# Altium PCB RGBKeyFob - PCB.PcbDoc
Units mm, origin at the board's own origin, x right, y up, seen from the top; angles counter-clockwise.
Board outline 28.22 x 45.2 mm, 2 copper layers (Top Layer, Bottom Layer), stack 1.571 mm thick; 13 components, 9 nets, 42 pads, 0 vias.
Unrouted connection lines stored in the file: 24.
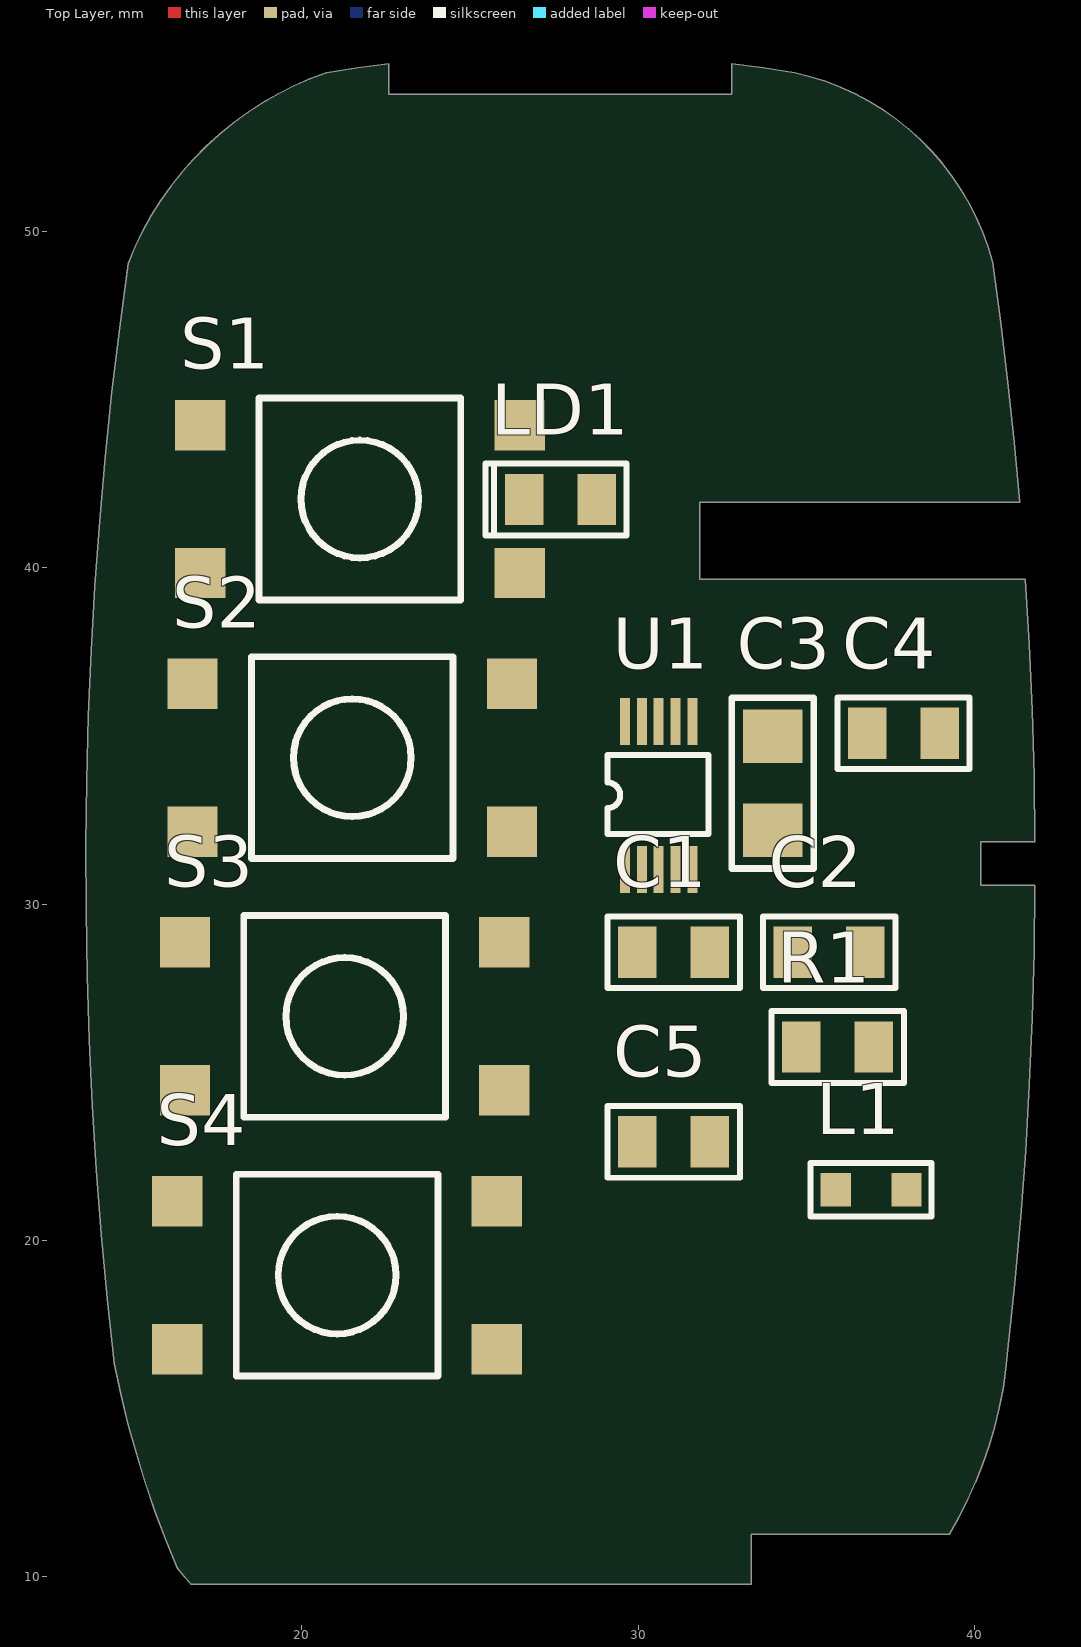
[diagram p0: Top Layer view]
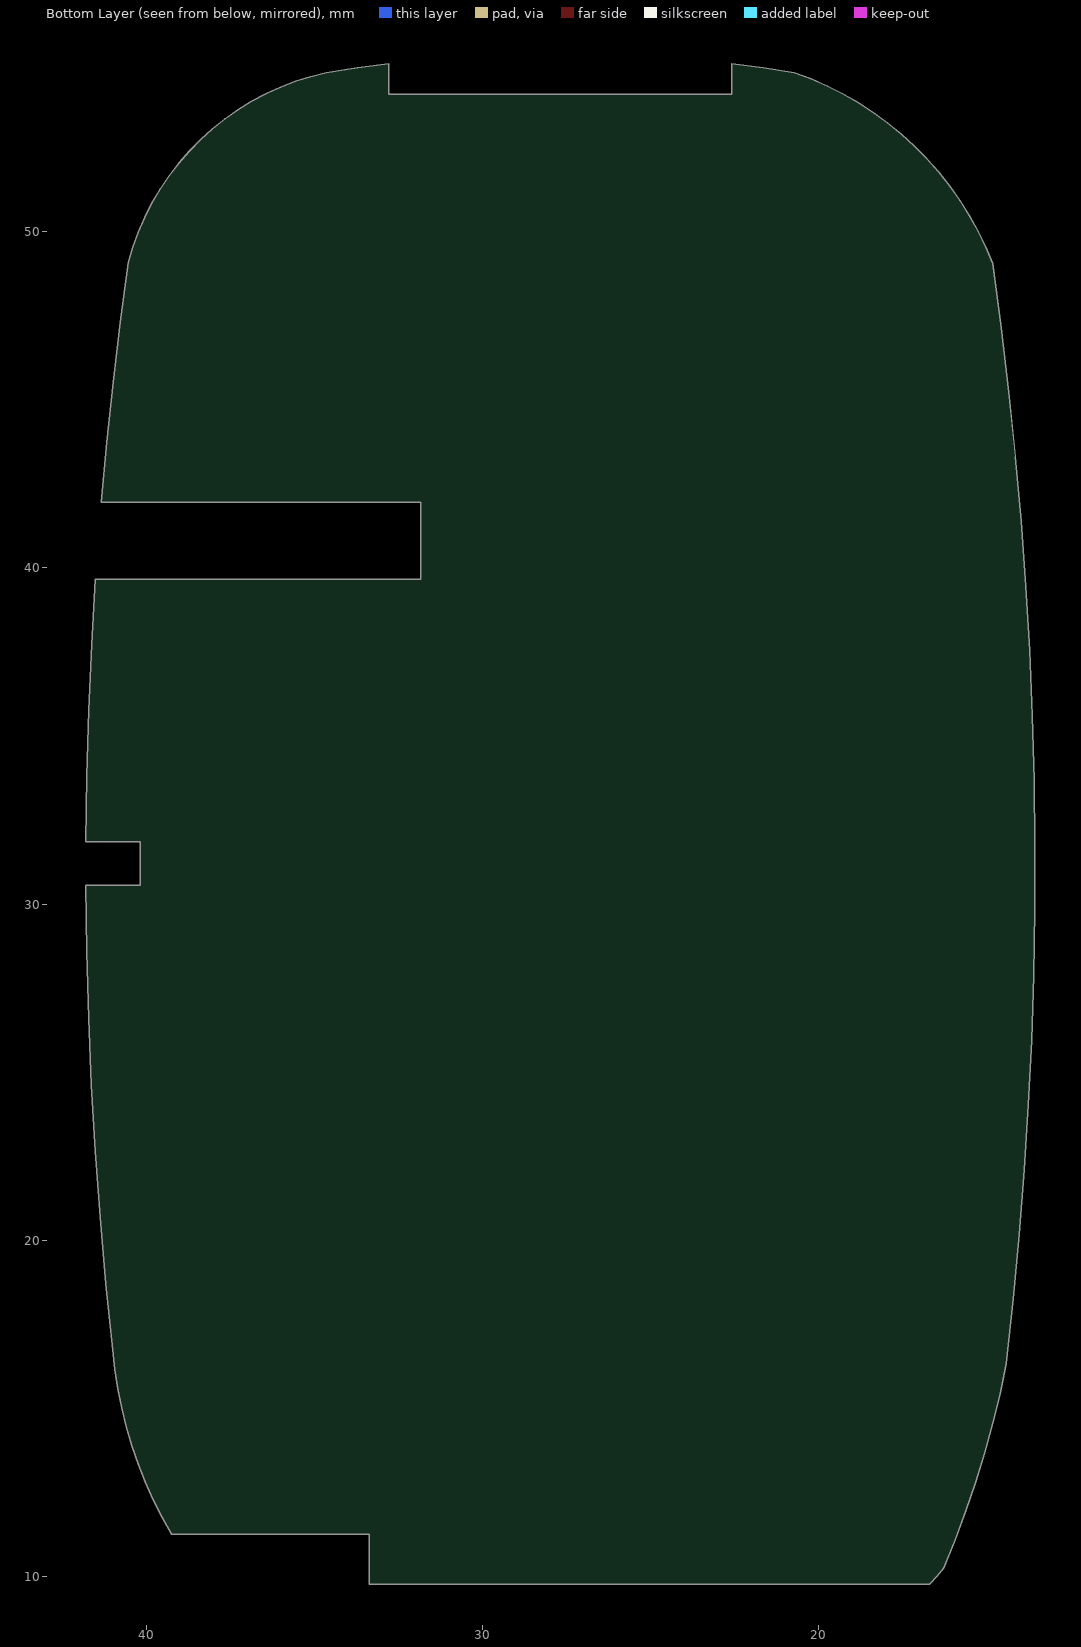
[diagram p1: Bottom Layer view, seen from below]

## Layer stack, top to bottom
Top Solder: solder mask 0.0102, Solder Resist, Dk 3.5
Top Layer: signal copper 0.0356
Dielectric 1: dielectric 1.5, FR-4, Dk 4.8
Bottom Layer: signal copper 0.0356
Bottom Solder: solder mask 0.0102, Solder Resist, Dk 3.5

## Board outline
16.291,10.262 cw(c44.141,22.124) 14.426,16.348 cw(c142.186,31.115) 14.833,49.055 cw(c23.917,45.515) 20.732,54.73 cw(c27.686,11.663) 22.586,54.989 22.586,54.087 32.786,54.087 32.786,54.989 cw(c27.686,11.663) 34.651,54.728 cw(c32.987,47.106) 40.536,49.078 cw(c-86.814,31.115) 41.339,41.954 31.836,41.954 31.836,39.663 41.512,39.663 cw(c-86.814,31.115) 41.795,31.863 40.185,31.863 40.185,30.563 41.796,30.563 cw(c-86.814,31.115) 40.993,16.756 cw(c28.302,17.773) 39.243,11.263 33.367,11.263 33.367,9.786 16.701,9.786 cw(c22.243,14.979)

## Design rules (kind name [scope] priority, off if disabled: settings)
Clearance [All] p1: gap=0.305
MinimumSolderMaskSliver [All] p1: minsoldermaskwidth=0.025
PolygonConnect [All] p1: connectstyle=Relief reliefconductorwidth=0.254 reliefentries=4 polygonreliefangle="90 Angle" airgapwidth=0.254
RoutingVias [All] p1: holewidth=0.711 width=1.27 viastyle="Through Hole" minholewidth=0.711 minwidth=1.27 maxholewidth=0.711 maxwidth=1.27
SilkToSilkClearance [All] p1: silktosilkclearance=0.025
SilkToSolderMaskClearance [IsPad] p1: minsilkscreentomaskgap=0.025 clearancetoexposedcopper=TRUE
SolderMaskExpansion [All] p1: expansion=0.102
UnpouredPolygon [All] p1: allowunpoured=FALSE
Width [All] p1: maxlimit=2.54 minlimit=0.254 preferedwidth=0.254
26 further rules are at their usual default settings.

## Components (designator, comment, footprint, x,y, rotation, side; value= is the part's Value field where it differs from the comment)
C1 "270pF 50V" C0805 31.051,28.575 r0 top
C2 "1nF 50V" C0805 35.674,28.575 r0 top
C3 "2,2uF 25V" C1206 34.001,33.6 r90 top
C4 "3pF 50V" C0805 37.887,35.086 r0 top
C5 "3pF 50V" C0805 31.051,22.936 r0 top
L1 "220nH" I0805 36.927,21.51 r0 top
LD1 "VERDE" LED0805_LED0805B 27.686,42.037 r180 top
R1 "470R 1%" R0805 35.928,25.756 r0 top
S1 "TECLA SMD 4,3mm" TECLA_TS-06M-ASM 21.722,42.051 r0 top
S2 "TECLA SMD 4,3mm" TECLA_TS-06M-ASM 21.497,34.359 r180 top
S3 "TECLA SMD 4,3mm" TECLA_TS-06M-ASM 21.273,26.667 r180 top
S4 "TECLA SMD 4,3mm" TECLA_TS-06M-ASM 21.049,18.975 r180 top
U1 "Si4010" MSOP-10 29.608,30.84 r90 top

## Footprints (in the part's own frame and the unit in brackets; to place one, negate y for a bottom-side part, rotate by r counter-clockwise, add the part's x,y. Pads: shape width x height; smd on the part's side, far side on the other; paste and mask are expansions set on the pad)
C0805 [mil]
  rect 45x60 smd: 1(-42.5,0) 2(42.5,0)
  silkscreen extent -78,-42 78,42, body extent -49,-24 49,25, height 31
C1206 [mil]
  rect 63x70 smd: 1(-55,0) 2(55,0)
  silkscreen extent -100,-48 100,48, body extent -63,-31 63,31, height 39
I0805 [mm]
  rect 0.9x1 smd: 1(-1.05,0) 2(1.05,0)
  silkscreen extent -1.8,-0.8 1.8,0.8, body extent -1,-0.6 1,0.6, height 1
LED0805_LED0805B [mil]
  rect 45x60 smd: 1(-42.5,0) 2(42.5,0)
  silkscreen extent -78,-42 88,42, body extent -40,-25 40,25, height 43
MSOP-10 [mm]
  rect 1.4x0.3 smd: 1(0.2,0) 2(0.2,-0.5) 3(0.2,-1) 4(0.2,-1.5) 5(0.2,-2) 6(4.6,-2) 7(4.6,-1.5) 8(4.6,-1) 9(4.6,-0.5) 10(4.6,0)
  silkscreen extent 1.25,-2.47 3.6,0.53, body extent -0.05,-2.5 4.85,0.5, height 1.15
R0805 [mil]
  rect 45x60 smd: 1(-42.5,0) 2(42.5,0)
  silkscreen extent -78,-42 78,42, body extent -44,-27 46,27, height 34
TECLA_TS-06M-ASM [mm]
  rect 1.5x1.5 smd: 1(-4.75,2.2) 2(4.75,-2.2) 3(4.75,2.2) 4(-4.75,-2.2)
  silkscreen extent -3,-3 3,3, body extent -5,-3.02 5,3.03, height 4.7

## Part data
C1: library part "CC 270pF 50V 0805"
C2: library part "CC 1nF 50V 0805"
C3: library part "CC 2,2uF 25V 1206"
C4 C5: library part "CC 3pF 50V 0805"
L1: library part "IND 220nH 0805 SMD", "IND 220nH 0805 SMD"
LD1: library part "LED VD 0805", "LED SMT 0805"
R1: library part "RES 470R 1% 0805", "RES 470R 1% 0805"
S1 S2 S3 S4: library part "TEC TACTIL 4,3MM SMD", "TECLA TACTIL 4,3MM SMD"
U1: library part "CI Si4010-C2-GT MSOP-10", "CI Si4010-C2-GT MSOP-10"

## Nets (pads, with @x,y where several pads share a name; then routed paths per layer and width w, separated by ;. In a path a pad name is that pad's centre, name@x,y a point inside that pad or via, vN(x,y) a via of type N, cw(c..) or ccw(c..) an arc to the next point about the centre after c; other vN are vias at no path point)
GND: C1.2 C2.2 C3.2 C4.2 S1.2 S2.2 S3.2 S4.2 U1.2
NetC4_1: C4.1 C5.1 C5.2 L1.2 U1.3 U1.4
NetLD1_2: LD1.2 R1.2
NetR1_1: R1.1 U1.6
SW0: S4.1 U1.1
SW1: S3.1 U1.10
SW2: S2.1 U1.9
SW3: S1.1 U1.8
VCC: C1.1 C2.1 C3.1 L1.1 LD1.1 U1.5
pads on no net: S1.3 S1.4 S2.3 S2.4 S3.3 S3.4 S4.3 S4.4 U1.7

## Silkscreen, mask and mechanical layers (free items; w line width, h text height)
Board Outline:
  circle w0.25: c21.497,34.359 r0.2
  circle w0.25: c21.722,42.051 r0.2
  circle w0.25: c27.686,42.563 r0.9
  circle w0.25: c21.273,26.667 r0.2
  circle w0.25: c21.049,18.975 r0.2
  lines w0.25: 14.426,16.348 ccw(c44.141,22.124) 16.291,10.262 ccw(c22.243,14.979) 16.701,9.786 33.367,9.786 33.367,11.263 39.243,11.263 ccw(c28.302,17.773) 40.993,16.756 ccw(c-86.814,31.115) 41.796,30.563 40.185,30.563 40.185,31.863 41.795,31.863 ccw(c-86.814,31.115) 41.512,39.663 31.836,39.663 31.836,41.954 41.339,41.954 ccw(c-86.814,31.115) 40.536,49.078 ccw(c32.987,47.106) 34.651,54.728 ccw(c27.686,11.663) 32.786,54.989 32.786,54.087 22.586,54.087 22.586,54.989 ccw(c27.686,11.663) 20.732,54.73 ccw(c23.917,45.515) 14.833,49.055 ccw(c142.186,31.115) 14.426,16.348